# Allegro board GPS_INTERFACE_BOARDv4.brd
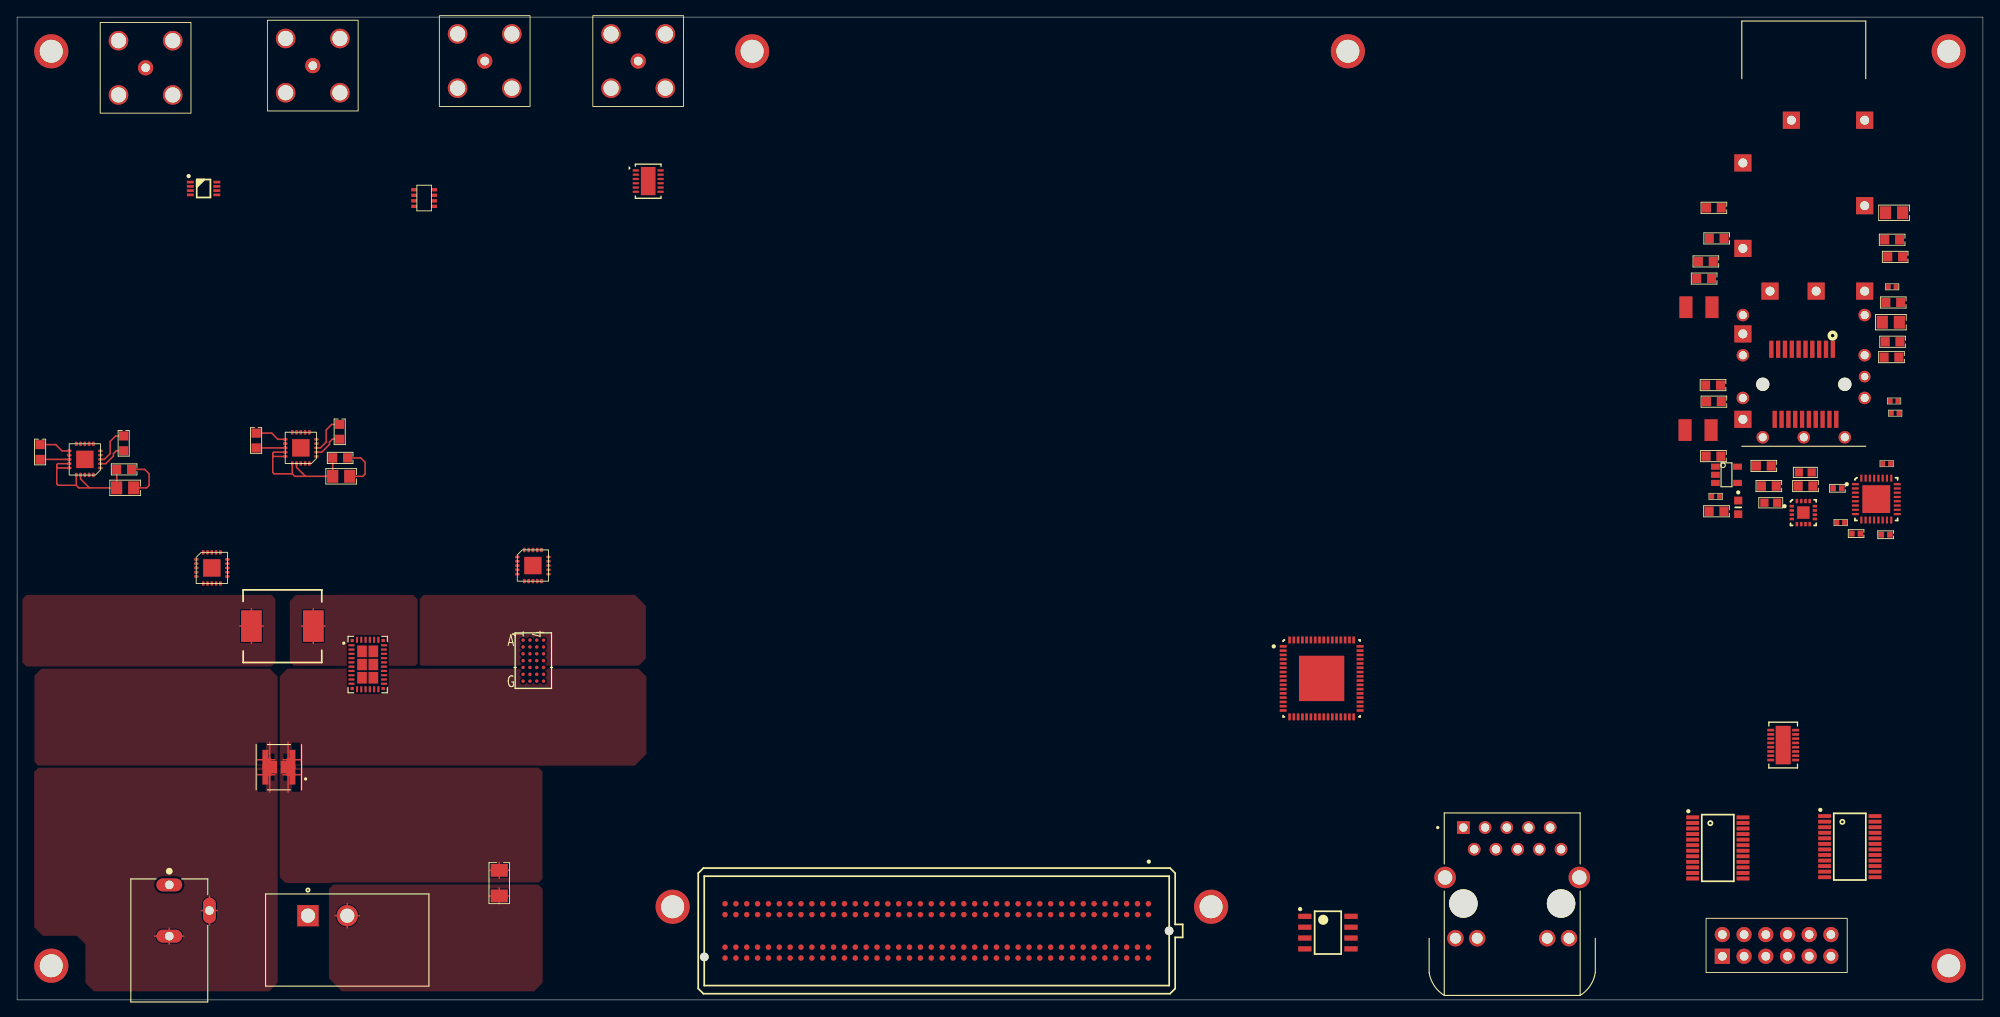
[diagram p0: board, top side]
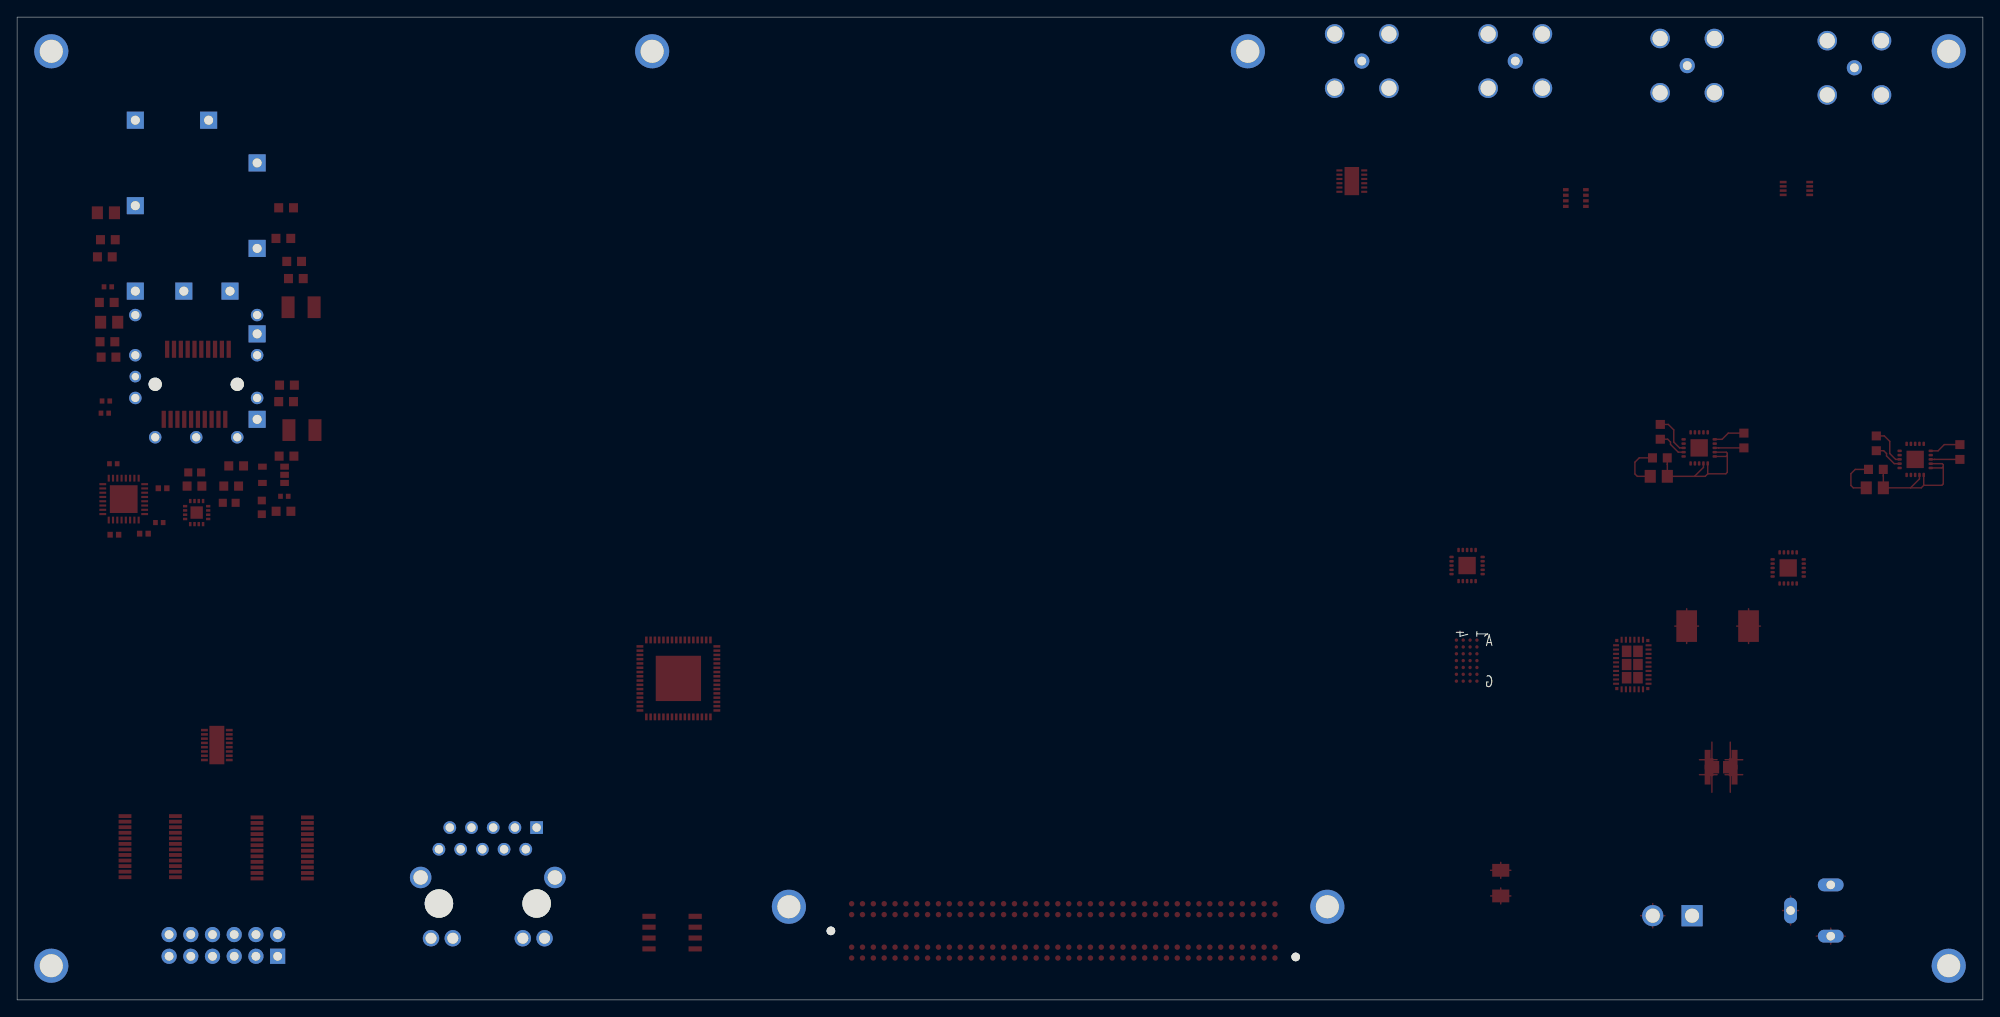
[diagram p1: board, bottom side, seen from below]

Outline 230 x 115 mm; copper layers: TOP, L2, L3, L4, L5, BOTTOM. Coordinates in mm from the lower left corner of the outline.
Outline path: 0,115 230,115 230,0 0,0 0,115

## Design rules (mm)
constraint set DEFAULT: min track width 0.17, pair gap 0.3
net group GPS_GROUP[0..4]: nets GPS_GROUP.GPS_CLK_N GPS_GROUP.GPS_CLK_P
net group CLK_TO_SFP[0..11]: nets CLK_TO_SFP.CLK_TO_SFP_N0 CLK_TO_SFP.CLK_TO_SFP_N1 CLK_TO_SFP.CLK_TO_SFP_N2 CLK_TO_SFP.CLK_TO_SFP_N3 CLK_TO_SFP.CLK_TO_SFP_N4 CLK_TO_SFP.CLK_TO_SFP_N5 CLK_TO_SFP.CLK_TO_SFP_P0 CLK_TO_SFP.CLK_TO_SFP_P1 CLK_TO_SFP.CLK_TO_SFP_P2 CLK_TO_SFP.CLK_TO_SFP_P3 CLK_TO_SFP.CLK_TO_SFP_P4 CLK_TO_SFP.CLK_TO_SFP_P5
net group FMC[0..72]: nets FMC.CLK_FILTER_A FMC.CLK_FILTER_B FMC.CLK_GEN_INTR* FMC.CLK_GEN_LOL FMC.CLK_GEN_LOL_N FMC.CLK_GEN_RST* FMC.CLK_TO_FPGA_N FMC.CLK_TO_FPGA_P FMC.DATA_TO_FF_N0 FMC.DATA_TO_FF_N1 FMC.DATA_TO_FF_N2 FMC.DATA_TO_FF_N3 FMC.DATA_TO_FF_N4 FMC.DATA_TO_FF_N5 FMC.DATA_TO_FF_P0 FMC.DATA_TO_FF_P1 FMC.DATA_TO_FF_P2 FMC.DATA_TO_FF_P3 FMC.DATA_TO_FF_P4 FMC.DATA_TO_FF_P5 FMC.GPS_CLK_EN* FMC.GPS_IRIGB FMC.GPS_PPS_N FMC.GPS_PPS_P FMC.GPS_SYNC_OUT_N FMC.GPS_SYNC_OUT_P FMC.I2C_BUS_INT0* FMC.I2C_BUS_INT1* FMC.I2C_BUS_RST* FMC.OSC_EN FMC.PWR_GOOD FMC.RECOV_CLK_N0 FMC.RECOV_CLK_N1 FMC.RECOV_CLK_N2 FMC.RECOV_CLK_N3 FMC.RECOV_CLK_N4 FMC.RECOV_CLK_N5 FMC.RECOV_CLK_P0 FMC.RECOV_CLK_P1 FMC.RECOV_CLK_P2 FMC.RECOV_CLK_P3 FMC.RECOV_CLK_P4 FMC.RECOV_CLK_P5 FMC.RECOV_DATA_N0 FMC.RECOV_DATA_N1 FMC.RECOV_DATA_N2 FMC.RECOV_DATA_N3 FMC.RECOV_DATA_N4 FMC.RECOV_DATA_N5 FMC.RECOV_DATA_P0 FMC.RECOV_DATA_P1 FMC.RECOV_DATA_P2 FMC.RECOV_DATA_P3 FMC.RECOV_DATA_P4 FMC.RECOV_DATA_P5 FMC.SCL FMC.SDA FMC.SFP_TX_DISABLE0 FMC.SFP_TX_DISABLE1 FMC.SFP_TX_DISABLE2 FMC.SFP_TX_DISABLE3 FMC.SFP_TX_DISABLE4 FMC.SFP_TX_DISABLE5 FMC.SPARE_BNC_0 FMC.SPARE_BNC_1 FMC.SPARE_LEMO_0 FMC.SPARE_LEMO_1 FMC.SPARE_RJ45_RX_0 FMC.SPARE_RJ45_RX_1 FMC.SPARE_RJ45_TX_0 FMC.SPARE_RJ45_TX_1 FMC.SPARE_RJ45_TX_EN_0 FMC.SPARE_RJ45_TX_EN_1
net group VM1: nets GND_SIGNAL

## Placement (name value [footprint] x y rotation side)
C60  0.1UF  [CAP0603]  12.52 62.08 0 top
C61  47UF  [CAP0805]  12.65 59.92 0 top
C64  0.1UF  [CAP0603]  12.47 65.13 90 top
C65  0.01UF  [CAP0603]  2.69 64.11 90 top
C70  47UF  [CAP0805]  37.92 61.26 0 top
C71  0.1UF  [CAP0603]  37.8 63.42 0 top
C75  0.1UF  [CAP0603]  37.74 66.47 90 top
C76  0.01UF  [CAP0603]  27.97 65.46 90 top
C111  0.1UF  [CAP0603]  219.3 75.21 0 top
C112  0.1UF  [CAP0603]  219.74 86.94 0 top
C113  22UF  [CAP0805]  219.61 92.1 0 top
C114  0.1UF  [CAP0603]  219.38 88.95 0 top
C115  0.1UF  [CAP0603]  197.59 86.41 0 top
C116  22UF  [CAP0805]  219.23 79.3 0 top
C117  0.1UF  [CAP0603]  209.25 60.12 0 top
C118  1000PF  [CAP0603]  204.95 60.12 0 top
C121  0.1UF  [CAP0603]  198.42 71.93 0 top
C122  0.1UF  [CAP0603]  197.38 84.4 0 top
C123  0.1UF  [CAP0603]  198.48 63.63 0 top
C124  0.1UF  [CAP0603]  219.51 81.61 0 top
C125  0.1UF  [CAP0603]  198.53 70 0 top
C126  1000PF  [CAP0603]  198.85 89.1 0 top
C127  1000PF  [CAP0603]  204.37 62.48 0 top
C128  1000PF  [CAP0603]  198.83 57.18 0 top
C129  1000PF  [CAP0603]  198.53 92.68 0 top
C130  1000PF  [CAP0603]  219.43 77.01 0 top
C131  0.47UF  [CAP0402]  218.62 54.43 0 top
C132  0.1UF  [CAP0402]  215.16 54.56 0 top
C133  0.1UF  [CAP0402]  212.98 59.87 0 top
D13  RED  [LEDC1608X80N]  201.37 57.63 270 top
F1  4A  [CAP1206]  56.41 13.67 90 top
FL1  120 Ohm@100MHz  [FIL_DLW5BTM501SQ2L]  30.63 27.23 270 top
IC1  SN74AVC2T45DCTR  [SOP50P310X90-8N]  21.82 94.95 0 top
IC2  SI5395A-A-GM  [QFN50P900X900X90-65N-S530]  152.63 37.62 0 top
IC3  24AA025E48T-I/OT  [SOIC127P600X175-8N]  153.37 7.87 0 top
IC6  PCA9539PW,118  [SOP65P640X110-24N]  214.43 17.93 0 top
IC7  PCA9539PW,118  [SOP65P640X110-24N]  198.98 17.78 0 top
J1  BNC/R  [BNC_RA_03161221]  72.67 109.86 0 top
J4  BNC/R  [BNC_RA_03161221]  54.71 109.86 0 top
J5  BNC/R  [BNC_RA_03161221]  34.59 109.32 0 top
J6  BNC/R  [BNC_RA_03161221]  15.04 109.07 0 top
J7  PJ-102AH  [CUI_PJ-102AH]  17.81 6.96 270 top
J8  ASP-134606-01  [SAMTEC_ASP-134606-01]  107.59 8.08 0 top
J17  6-2301994-2  [TE_6-2301994-2]  174.93 11.2 0 top
J18  1367073-1  [TE_2227023-1]  209.04 72.03 270 top
L6  3.3 uH  [WE-LHMI_8040]  31.04 43.74 180 top
L7  4.7 uH  [CAP1210]  196.77 81.05 0 top
L8  4.7 uH  [CAP1210]  196.67 66.67 0 top
NOREF  -  [unnamed]  226 4 0 top
NOREF#2  -  [unnamed]  4 4 0 top
NOREF#3  -  [unnamed]  226 111 0 top
NOREF#4  -  [unnamed]  155.7 111 0 top
NOREF#5  -  [unnamed]  4 111 0 top
NOREF#6  -  [unnamed]  86 111 0 top
NOREF#7  -  [unnamed]  76.7 10.9 0 top
NOREF#8  -  [unnamed]  139.7 10.9 0 top
P1  RECP6X2  [RECPT6X2_100]  199.52 5.11 90 top
R92  4.7k  [RES0402]  219.38 83.44 0 top
R93  4.7k  [RES0402]  198.73 58.93 0 top
R95  4.7k  [RES0402]  219.61 70.08 0 top
R96  4.99K  [RES0603]  209.22 61.72 0 top
R97  4.7k  [RES0402]  219.74 68.66 0 top
R98  4.99K  [RES0603]  205.18 58.17 0 top
R102  0  [RES0402]  213.36 55.85 0 top
R103  0  [RES0402]  218.74 62.74 0 top
S1  L101011MS02Q  [SW_L101011MS02Q]  38.63 7.01 0 top
U1  LTC6957IDD-2#PBF  [DFN_12]  73.84 95.81 0 top
U2  MAX9371EKA+  [SOT-23-8]  47.62 93.83 0 top
U5  LTM8063EY#PBF  [BGA28]  60.4 39.7 0 top
U6  LT8645SJV-2  [CONV_T8645SIV]  41.02 39.24 0 top
U7  TPS7A8500RGRT  [QFN20_3P65MMSQ]  60.35 50.83 0 top
U9  TPS7A8500RGRT  [QFN20_3P65MMSQ]  7.92 63.25 180 top
U11  TPS7A8500RGRT  [QFN20_3P65MMSQ]  33.2 64.59 180 top
U12  TPS7A8500RGRT  [QFN20_3P65MMSQ]  22.78 50.55 0 top
U16  NB7V52MMNG  [PQFN50P300X300X100-17N-S145]  208.99 57.02 0 top
U17  ADN2814ACPZ  [QFN50P500X500X100-33N-S325]  217.53 58.6 0 top
U18  SN74LVC1G32  [SOT23-5]  200 61.44 0 top
U40  LTC4317CDHC#PBF  [DFN-16_DHC]  206.63 29.82 0 top

## Library data of the parts
C60 C61 C64 C65 C70 C71 C75 C76 = CAP_NP: Tolerance: TOL?; User Part Number: PN?
C111-C118 C121-C133 = CAP_NP: Tolerance: TOL?; User Part Number: PN?; room: SFP1
D13 = LED: room: SFP1
F1 = FUSE: Tolerance: TOL?; User Part Number: PN?
FL1 = 490-11112-1-ND
IC1 = 74AVC2T45_DCT_0
IC2 = SI5395_QFN_1
IC3 = 24AA025E48_SOIC_0
IC6 IC7 = PCA9539_TSSOP_0
J1 J4-J6 = BNCR_3
J7 = PJ-102AH
J8 = CON160P_10
J17 = 6-2301994-2
J18 = CON20P_SFP-1367073-1_1: room: SFP1
L6 = IND
L7 L8 = IND: room: SFP1
P1 = RECPT 6X2 100MIL
R92 R93 R95-R98 R102 R103 = R: Tolerance: TOL?; User Part Number: PN?; room: SFP1
S1 = L101011MS02Q
U1 = LTC6957-2_3
U2 = MAX9371_2
U5 = LTM8063_0: User Part Number: PN; Tolerance: TOL
U6 = LT8645
U7 U9 U11 U12 = TPS7A8500RGRT
U16 = NB7V52M_2: room: SFP1
U17 = ADN2814ACPZ_1: room: SFP1
U18 = SN74LVC1G32_4: room: SFP1
U40 = LTC4317CDHC_0: User Part Number: PN; Tolerance: TOL

## Footprints (pads in the part's own frame, mm; a bottom-side part is the same pattern mirrored in y, then rotated)
BGA28
  round 0.4 smd: A1(-1.2,2.4) A2(-0.4,2.4) A3(0.4,2.4) A4(1.2,2.4) B1(-1.2,1.6) B2(-0.4,1.6) B3(0.4,1.6) B4(1.2,1.6) C1(-1.2,0.8) C2(-0.4,0.8) C3(0.4,0.8) C4(1.2,0.8) D1(-1.2,0) D2(-0.4,0) D3(0.4,0) D4(1.2,0) E1(-1.2,-0.8) E2(-0.4,-0.8) E3(0.4,-0.8) E4(1.2,-0.8) F1(-1.2,-1.6) F2(-0.4,-1.6) F3(0.4,-1.6) F4(1.2,-1.6) G1(-1.2,-2.4) G2(-0.4,-2.4) G3(0.4,-2.4) G4(1.2,-2.4)
BNC_RA_03161221
  round 1.778 hole 1.016: 1(0,0)
  round 2.286 hole 1.778: 2(3.175,3.175) 3(3.175,-3.175) 4(-3.175,-3.175) 5(-3.175,3.175)
CAP0402
  rect 0.635x0.686 smd: 1(-0.499,0) 2(0.499,0)
CAP0603
  rect 1.05x1.08 smd: 1(-0.865,0) 2(0.865,0)
CAP0805
  rect 1.3x1.5 smd: 1(-1,0) 2(1,0)
CAP1206
  rect 1.5x2 smd: 1(-1.5,0) 2(1.5,0)
CAP1210
  rect 1.524x2.54 smd: 1(-1.524,0) 2(1.524,0)
CONV_T8645SIV
  rect 0.7x0.25 smd: 1(-1.9,2.25) 2(-1.9,1.75) 3(-1.9,1.25) 4(-1.9,0.75) 5(-1.9,0.25) 6(-1.9,-0.25) 7(-1.9,-0.75) 8(-1.9,-1.25) 9(-1.9,-1.75) 10(-1.9,-2.25) 17(1.9,-2.25) 18(1.9,-1.75) 19(1.9,-1.25) 20(1.9,-0.75) 21(1.9,-0.25) 22(1.9,0.25) 23(1.9,0.75) 24(1.9,1.25) 25(1.9,1.75) 26(1.9,2.25)
  rect 0.25x0.7 smd: 11(-1.25,-2.9) 12(-0.75,-2.9) 13(-0.25,-2.9) 14(0.25,-2.9) 15(0.75,-2.9) 16(1.25,-2.9) 27(1.25,2.9) 28(0.75,2.9) 29(0.25,2.9) 30(-0.25,2.9) 31(-0.75,2.9) 32(-1.25,2.9)
  rect 1.125x1.355 smd: 33(-0.662,1.543) 34(0.662,1.543) 37(-0.662,-1.543) 38(0.662,-1.543)
  rect 1.125x1.33 smd: 35(-0.662,0) 36(0.662,0)
  rect 0.375x0.375 smd: 39(-1.813,2.813) 40(-1.813,-2.813) 41(1.813,-2.813) 42(1.813,2.813)
CUI_PJ-102AH
  oval 1.508x3.016 hole 1: 1(-6.5,0) 2(-0.5,0)
  oval 3.016x1.508 hole 1: 3(-3.5,4.7)
DFN-16_DHC
  rect 0.805x0.3 smd: 1(-1.452,1.75) 2(-1.452,1.25) 3(-1.452,0.75) 4(-1.452,0.25) 5(-1.452,-0.25) 6(-1.452,-0.75) 7(-1.452,-1.25) 8(-1.452,-1.75) 9(1.452,-1.75) 10(1.452,-1.25) 11(1.452,-0.75) 12(1.452,-0.25) 13(1.452,0.25) 14(1.452,0.75) 15(1.452,1.25) 16(1.452,1.75)
  rect 1.75x4.5 smd: 17(0,0)
DFN_12
  rect 0.711x0.254 smd: 1(-1.45,1.25) 2(-1.45,0.75) 3(-1.45,0.25) 4(-1.45,-0.25) 5(-1.45,-0.75) 6(-1.45,-1.25) 7(1.45,-1.25) 8(1.45,-0.75) 9(1.45,-0.25) 10(1.45,0.25) 11(1.45,0.75) 12(1.45,1.25)
  rect 1.702x3.302 smd: 13(0,0)
FIL_DLW5BTM501SQ2L
  custom 2.3x1.7 smd: 1(0.875,1.075) 2(-0.875,1.075) 3(-0.875,-1.075) 4(0.875,-1.075)
LEDC1608X80N
  rect 0.9x0.95 smd: 1(-0.8,0) 2(0.8,0)
PQFN50P300X300X100-17N-S145
  rect 0.5x0.3 smd: 1(-1.35,0.75) 2(-1.35,0.25) 3(-1.35,-0.25) 4(-1.35,-0.75) 9(1.35,-0.75) 10(1.35,-0.25) 11(1.35,0.25) 12(1.35,0.75)
  rect 0.3x0.5 smd: 5(-0.75,-1.35) 6(-0.25,-1.35) 7(0.25,-1.35) 8(0.75,-1.35) 13(0.75,1.35) 14(0.25,1.35) 15(-0.25,1.35) 16(-0.75,1.35)
  rect 1.45x1.45 smd: 17(0,0)
QFN20_3P65MMSQ
  rrect 0.51x0.305 smd: 1(-1.82,1) 2(-1.82,0.5) 3(-1.82,0) 4(-1.82,-0.5) 5(-1.82,-1) 11(1.82,-1) 12(1.82,-0.5) 13(1.82,0) 14(1.82,0.5) 15(1.82,1)
  rrect 0.305x0.51 smd: 6(-1,-1.82) 7(-0.5,-1.82) 8(0,-1.82) 9(0.5,-1.82) 10(1,-1.82) 16(1,1.82) 17(0.5,1.82) 18(0,1.82) 19(-0.5,1.82) 20(-1,1.82)
  rect 2.032x2.032 smd: 21(0,0)
QFN50P500X500X100-33N-S325
  rect 0.8x0.25 smd: 1(-2.45,1.75) 2(-2.45,1.25) 3(-2.45,0.75) 4(-2.45,0.25) 5(-2.45,-0.25) 6(-2.45,-0.75) 7(-2.45,-1.25) 8(-2.45,-1.75) 17(2.45,-1.75) 18(2.45,-1.25) 19(2.45,-0.75) 20(2.45,-0.25) 21(2.45,0.25) 22(2.45,0.75) 23(2.45,1.25) 24(2.45,1.75)
  rect 0.25x0.8 smd: 9(-1.75,-2.45) 10(-1.25,-2.45) 11(-0.75,-2.45) 12(-0.25,-2.45) 13(0.25,-2.45) 14(0.75,-2.45) 15(1.25,-2.45) 16(1.75,-2.45) 25(1.75,2.45) 26(1.25,2.45) 27(0.75,2.45) 28(0.25,2.45) 29(-0.25,2.45) 30(-0.75,2.45) 31(-1.25,2.45) 32(-1.75,2.45)
  rect 3.25x3.25 smd: 33(0,0)
QFN50P900X900X90-65N-S530
  rect 0.8x0.3 smd: 1(-4.5,3.75) 2(-4.5,3.25) 3(-4.5,2.75) 4(-4.5,2.25) 5(-4.5,1.75) 6(-4.5,1.25) 7(-4.5,0.75) 8(-4.5,0.25) 9(-4.5,-0.25) 10(-4.5,-0.75) 11(-4.5,-1.25) 12(-4.5,-1.75) 13(-4.5,-2.25) 14(-4.5,-2.75) 15(-4.5,-3.25) 16(-4.5,-3.75) 33(4.5,-3.75) 34(4.5,-3.25) 35(4.5,-2.75) 36(4.5,-2.25) 37(4.5,-1.75) 38(4.5,-1.25) 39(4.5,-0.75) 40(4.5,-0.25) 41(4.5,0.25) 42(4.5,0.75) 43(4.5,1.25) 44(4.5,1.75) 45(4.5,2.25) 46(4.5,2.75) 47(4.5,3.25) 48(4.5,3.75)
  rect 0.3x0.8 smd: 17(-3.75,-4.5) 18(-3.25,-4.5) 19(-2.75,-4.5) 20(-2.25,-4.5) 21(-1.75,-4.5) 22(-1.25,-4.5) 23(-0.75,-4.5) 24(-0.25,-4.5) 25(0.25,-4.5) 26(0.75,-4.5) 27(1.25,-4.5) 28(1.75,-4.5) 29(2.25,-4.5) 30(2.75,-4.5) 31(3.25,-4.5) 32(3.75,-4.5) 49(3.75,4.5) 50(3.25,4.5) 51(2.75,4.5) 52(2.25,4.5) 53(1.75,4.5) 54(1.25,4.5) 55(0.75,4.5) 56(0.25,4.5) 57(-0.25,4.5) 58(-0.75,4.5) 59(-1.25,4.5) 60(-1.75,4.5) 61(-2.25,4.5) 62(-2.75,4.5) 63(-3.25,4.5) 64(-3.75,4.5)
  rect 5.3x5.3 smd: 65(0,0)
RECPT6X2_100
  rect 1.778x1.778 hole 1.016: 1(0,0)
  round 1.778 hole 1.016: 2(2.54,0) 3(0,-2.54) 4(2.54,-2.54) 5(0,-5.08) 6(2.54,-5.08) 7(0,-7.62) 8(2.54,-7.62) 9(0,-10.16) 10(2.54,-10.16) 11(0,-12.7) 12(2.54,-12.7)
RES0402
  rect 0.55x0.6 smd: 1(-0.45,0) 2(0.45,0)
RES0603
  rect 0.95x0.95 smd: 1(-0.75,0) 2(0.75,0)
SAMTEC_ASP-134606-01
  round 1.001 hole 1.3 unplated: (-27.19,-3.05) (27.19,0)
  round 0.64 smd: C1(24.765,3.175) C2(23.495,3.175) C3(22.225,3.175) C4(20.955,3.175) C5(19.685,3.175) C6(18.415,3.175) C7(17.145,3.175) C8(15.875,3.175) C9(14.605,3.175) C10(13.335,3.175) C11(12.065,3.175) C12(10.795,3.175) C13(9.525,3.175) C14(8.255,3.175) C15(6.985,3.175) C16(5.715,3.175) C17(4.445,3.175) C18(3.175,3.175) C19(1.905,3.175) C20(0.635,3.175) C21(-0.635,3.175) C22(-1.905,3.175) C23(-3.175,3.175) C24(-4.445,3.175) C25(-5.715,3.175) C26(-6.985,3.175) C27(-8.255,3.175) C28(-9.525,3.175) C29(-10.795,3.175) C30(-12.065,3.175) C31(-13.335,3.175) C32(-14.605,3.175) C33(-15.875,3.175) C34(-17.145,3.175) C35(-18.415,3.175) C36(-19.685,3.175) C37(-20.955,3.175) C38(-22.225,3.175) C39(-23.495,3.175) C40(-24.765,3.175) D1(24.765,1.905) D2(23.495,1.905) D3(22.225,1.905) D4(20.955,1.905) D5(19.685,1.905) D6(18.415,1.905) D7(17.145,1.905) D8(15.875,1.905) D9(14.605,1.905) D10(13.335,1.905) D11(12.065,1.905) D12(10.795,1.905) D13(9.525,1.905) D14(8.255,1.905) D15(6.985,1.905) D16(5.715,1.905) D17(4.445,1.905) D18(3.175,1.905) D19(1.905,1.905) D20(0.635,1.905) D21(-0.635,1.905) D22(-1.905,1.905) D23(-3.175,1.905) D24(-4.445,1.905) D25(-5.715,1.905) D26(-6.985,1.905) D27(-8.255,1.905) D28(-9.525,1.905) D29(-10.795,1.905) D30(-12.065,1.905) D31(-13.335,1.905) D32(-14.605,1.905) D33(-15.875,1.905) D34(-17.145,1.905) D35(-18.415,1.905) D36(-19.685,1.905) D37(-20.955,1.905) D38(-22.225,1.905) D39(-23.495,1.905) D40(-24.765,1.905) G1(24.765,-1.905) G2(23.495,-1.905) G3(22.225,-1.905) G4(20.955,-1.905) G5(19.685,-1.905) G6(18.415,-1.905) G7(17.145,-1.905) G8(15.875,-1.905) G9(14.605,-1.905) G10(13.335,-1.905) G11(12.065,-1.905) G12(10.795,-1.905) G13(9.525,-1.905) G14(8.255,-1.905) G15(6.985,-1.905) G16(5.715,-1.905) G17(4.445,-1.905) G18(3.175,-1.905) G19(1.905,-1.905) G20(0.635,-1.905) G21(-0.635,-1.905) G22(-1.905,-1.905) G23(-3.175,-1.905) G24(-4.445,-1.905) G25(-5.715,-1.905) G26(-6.985,-1.905) G27(-8.255,-1.905) G28(-9.525,-1.905) G29(-10.795,-1.905) G30(-12.065,-1.905) G31(-13.335,-1.905) G32(-14.605,-1.905) G33(-15.875,-1.905) G34(-17.145,-1.905) G35(-18.415,-1.905) G36(-19.685,-1.905) G37(-20.955,-1.905) G38(-22.225,-1.905) G39(-23.495,-1.905) G40(-24.765,-1.905) H1(24.765,-3.175) H2(23.495,-3.175) H3(22.225,-3.175) H4(20.955,-3.175) H5(19.685,-3.175) H6(18.415,-3.175) H7(17.145,-3.175) H8(15.875,-3.175) H9(14.605,-3.175) H10(13.335,-3.175) H11(12.065,-3.175) H12(10.795,-3.175) H13(9.525,-3.175) H14(8.255,-3.175) H15(6.985,-3.175) H16(5.715,-3.175) H17(4.445,-3.175) H18(3.175,-3.175) H19(1.905,-3.175) H20(0.635,-3.175) H21(-0.635,-3.175) H22(-1.905,-3.175) H23(-3.175,-3.175) H24(-4.445,-3.175) H25(-5.715,-3.175) H26(-6.985,-3.175) H27(-8.255,-3.175) H28(-9.525,-3.175) H29(-10.795,-3.175) H30(-12.065,-3.175) H31(-13.335,-3.175) H32(-14.605,-3.175) H33(-15.875,-3.175) H34(-17.145,-3.175) H35(-18.415,-3.175) H36(-19.685,-3.175) H37(-20.955,-3.175) H38(-22.225,-3.175) H39(-23.495,-3.175) H40(-24.765,-3.175)
SOIC127P600X175-8N
  rect 1.55x0.6 smd: 1(-2.7,1.905) 2(-2.7,0.635) 3(-2.7,-0.635) 4(-2.7,-1.905) 5(2.7,-1.905) 6(2.7,-0.635) 7(2.7,0.635) 8(2.7,1.905)
SOP50P310X90-8N
  rect 0.8x0.3 smd: 1(-1.55,0.75) 2(-1.55,0.25) 3(-1.55,-0.25) 4(-1.55,-0.75) 5(1.55,-0.75) 6(1.55,-0.25) 7(1.55,0.25) 8(1.55,0.75)
SOP65P640X110-24N
  rect 1.5x0.45 smd: 1(-2.95,3.575) 2(-2.95,2.925) 3(-2.95,2.275) 4(-2.95,1.625) 5(-2.95,0.975) 6(-2.95,0.325) 7(-2.95,-0.325) 8(-2.95,-0.975) 9(-2.95,-1.625) 10(-2.95,-2.275) 11(-2.95,-2.925) 12(-2.95,-3.575) 13(2.95,-3.575) 14(2.95,-2.925) 15(2.95,-2.275) 16(2.95,-1.625) 17(2.95,-0.975) 18(2.95,-0.325) 19(2.95,0.325) 20(2.95,0.975) 21(2.95,1.625) 22(2.95,2.275) 23(2.95,2.925) 24(2.95,3.575)
SOT23-5
  rect 1.016x0.711 smd: 1(-1.295,0.953) 2(-1.295,0) 3(-1.295,-0.953) 4(1.295,-0.953) 5(1.295,0.953)
SOT-23-8
  rect 0.66x0.381 smd: 1(-1.175,0.975) 2(-1.175,0.325) 3(-1.175,-0.325) 4(-1.175,-0.975) 5(1.175,-0.975) 6(1.175,-0.325) 7(1.175,0.325) 8(1.175,0.975)
SW_L101011MS02Q
  rect 2.48x2.48 hole 1.65: 1(-4.6,2.85)
  round 2.48 hole 1.65: 2(0,2.85)
TE_6-2301994-2
  round 3.33 hole 3.33 unplated: (-5.715,0.075) (5.715,0.075)
  rect 1.488x1.488 hole 0.98: P1(-5.715,8.965)
  round 1.488 hole 0.98: P2(-4.445,6.425) P3(-3.175,8.965) P4(-1.905,6.425) P5(-0.635,8.965) P6(0.635,6.425) P7(1.905,8.965) P8(3.175,6.425) P9(4.445,8.965) P10(5.715,6.425)
  round 1.92 hole 1.28: P11(-6.645,-3.985) P12(-4.095,-3.985) P13(4.095,-3.985) P14(6.645,-3.985)
  round 2.52 hole 1.68: S1(-7.855,3.125) S2(7.855,3.125)
TE_2227023-1
  round 1.55 hole 1.55 unplated: (0,4.8) (0,-4.8)
  rect 2x0.5 smd: 1(-4.1,3.4) 2(-4.1,2.6) 3(-4.1,1.8) 4(-4.1,1) 5(-4.1,0.2) 6(-4.1,-0.6) 7(-4.1,-1.4) 8(-4.1,-2.2) 9(-4.1,-3) 10(-4.1,-3.8) 11(4.1,-3.4) 12(4.1,-2.6) 13(4.1,-1.8) 14(4.1,-1) 15(4.1,-0.2) 16(4.1,0.6) 17(4.1,1.4) 18(4.1,2.2) 19(4.1,3) 20(4.1,3.8)
  round 1.358 hole 0.85: S1(-0.9,7.125)
  round 1.458 hole 0.95: S2(1.6,7.125) S3(-3.4,7.125) S4(-8.1,7.125) S5(6.2,4.8) S6(6.2,0) S7(6.2,-4.8) S8(1.6,-7.125) S9(-3.4,-7.125) S10(-8.1,-7.125)
  rect 2x2 hole 1.05: S11(-10.9,7.125) S12(-20.9,7.125) S13(-30.9,7.125) S14(-10.9,1.45) S15(-30.9,-1.45) S16(-10.9,-3.95) S17(-25.9,-7.125) S18(-15.9,-7.125) S19(-5.9,-7.125) S20(4.1,-7.125)
unnamed
  round 3.988 hole 2.692: 1(0,0)
WE-LHMI_8040
  rect 2.42x3.7 smd: 1(-3.62,0) 2(3.62,0)

## Nets
12V_CONN: J7.1 S1.1
12V_FUSE: F1.2 FL1.1
12V_SW: F1.1 S1.2
GND_IN: FL1.4 J7.2 J7.3
GND_POWER: C60.2 C61.2 C65.2 C70.2 C71.2 C76.2 FL1.3 IC1.3 IC1.4 IC2.65 J1.2 J1.3 J1.4 J1.5 J4.2 J4.3 J4.4 J4.5 J5.2 J5.3 J5.4 J5.5 J6.2 J6.3 J6.4 J6.5 J8.C1 J8.C4 J8.C5 J8.C9 J8.C12 J8.C13 J8.C16 J8.C17 J8.C20 J8.C21 J8.C24 J8.C25 J8.C28 J8.C29 J8.C32 J8.C33 J8.C34 J8.C36 J8.C38 J8.C40 J8.D2 J8.D3 J8.D6 J8.D7 J8.D10 J8.D13 J8.D16 J8.D19 J8.D22 J8.D25 J8.D28 J8.D34 J8.D37 J8.D39 J8.G1 J8.G4 J8.G5 J8.G8 J8.G11 J8.G14 J8.G17 J8.G20 J8.G23 J8.G26 J8.G29 J8.G32 J8.G35 J8.G38 J8.G40 J8.H3 J8.H6 J8.H9 J8.H12 J8.H15 J8.H18 J8.H21 J8.H24 J8.H27 J8.H30 J8.H33 J8.H36 J8.H39 J17.P10 J17.P11 J17.P12 J17.P13 J17.P14 J17.S1 J17.S2(SHIELD_1) P1.2 P1.4 P1.6 P1.8 P1.10 P1.12 U1.5 U1.13 U2.2 U5.A1 U5.A4 U5.B2 U5.C2 U5.C3 U5.D1 U5.D2 U5.D3 U5.D4 U5.E1 U5.E2 U5.E3 U5.E4 U6.3 U6.7 U6.8 U6.9 U6.10 U6.17 U6.18 U6.19 U6.20 U6.24 U6.30 U6.33 U6.34 U6.35 U6.36 U6.37 U6.38 U6.39 U6.40 U6.41 U6.42 U7.8 U7.18 U7.21 U9.6 U9.8 U9.10 U9.11 U9.18 U9.21 U11.6 U11.8 U11.10 U11.11 U11.18 U11.21 U12.7 U12.8 U12.10 U12.18 U12.21
GND_SIGNAL: C111.2 C112.2 C113.1 C114.1 C115.1 C116.1 C117.2 C118.2 C121.1 C122.1 C123.1 C124.1 C125.1 C126.2 C127.2 C128.2 C129.2 C130.2 C132.1 C133.2 IC3.4(VSS) IC6.12 IC7.12 J18.1 J18.9 J18.10 J18.11 J18.14 J18.17 J18.20(VEET2) J18.S1 J18.S2 J18.S3 J18.S4 J18.S5 J18.S6 J18.S7 J18.S8 J18.S9 J18.S10 J18.S11 J18.S12 J18.S13 J18.S14 J18.S15 J18.S16 J18.S17 J18.S18 J18.S19 J18.S20 R96.1 R102.1 R103.2 U16.9 U16.17 U17.6 U17.7 U17.8 U17.11 U17.13 U17.17 U17.23 U17.30 U17.33 U18.3 U40.1 U40.3 U40.5 U40.17
VCC3V3: C111.1 C112.1 C121.2 C122.2 C123.2 C124.2 C125.2 C126.1 C127.1 C128.1 C129.1 C130.1 IC1.8(VCCB) IC3.8 IC6.24(VDD) IC7.24(VDD) L7.1 L8.1 P1.9 R92.1 R93.1 R95.1 R97.1 U17.1 U17.2 U17.10 U17.12 U17.18 U17.24 U17.31 U17.32 U18.5 U40.7
VCC3V3_LFILT: U1.2(VCC)
VCC5V: IC1.1 IC1.5 P1.11
VCC5V_LFILT: U2.1(VCC)
VCC_1V8: C117.1 C118.1 R98.1 U16.12
VCCR_SFP INTERFACE_SFP1: C113.2 C114.2 J18.15 L7.2
VCCT_SFP INTERFACE_SFP1: C115.2 C116.2 J18.16 L8.2
VDD_FILT: IC2.32 IC2.46 IC2.60
VDDA_FILT: IC2.13
VDDO8: IC2.52
VDDO9: IC2.57
VDDO_FILT: IC2.22 IC2.26 IC2.29 IC2.33 IC2.36 IC2.40 IC2.43 IC2.49
A0_1: IC6.21
A0_2: IC7.21
A0_BID: IC3.1
A1_1: IC6.2
A1_2: IC7.2
A1_BID: IC3.2
A2_BID: IC3.3
CLK_FDBACK_N: IC2.62
CLK_FDBACK_P: IC2.61
CLK_TO_SFP.CLK_TO_SFP_N0: IC2.23 U16.7
CLK_TO_SFP.CLK_TO_SFP_N1: IC2.27
CLK_TO_SFP.CLK_TO_SFP_N2: IC2.30
CLK_TO_SFP.CLK_TO_SFP_N3: IC2.34
CLK_TO_SFP.CLK_TO_SFP_N4: IC2.37
CLK_TO_SFP.CLK_TO_SFP_N5: IC2.41
CLK_TO_SFP.CLK_TO_SFP_P0: IC2.24 U16.6
CLK_TO_SFP.CLK_TO_SFP_P1: IC2.28
CLK_TO_SFP.CLK_TO_SFP_P2: IC2.31
CLK_TO_SFP.CLK_TO_SFP_P3: IC2.35
CLK_TO_SFP.CLK_TO_SFP_P4: IC2.38
CLK_TO_SFP.CLK_TO_SFP_P5: IC2.42
CML_SFP_TD_N_SFP INTERFACE_SFP1: U16.10
CML_SFP_TD_P_SFP INTERFACE_SFP1: U16.11
FB_1V8: U12.3
FB_3V3_1: C64.2 U9.3
FB_3V3_2: C75.2 U11.3
FB_3V5: U6.32
FB_5V: U7.3
FB_5V5: U5.A2
FMC.CLK_FILTER_A: J8.C14 U1.1
FMC.CLK_FILTER_B: J8.C15 U1.6
FMC.CLK_GEN_INTR*: IC2.12 J8.C27
FMC.CLK_GEN_LOL: J8.C26
FMC.CLK_GEN_LOL_N: J8.C10
FMC.CLK_GEN_RST*: IC2.6 J8.C19
FMC.CLK_TO_FPGA_N: IC2.44 J8.G3
FMC.CLK_TO_FPGA_P: IC2.45 J8.G2
FMC.DATA_TO_FF_N0: J8.H8 U16.3
FMC.DATA_TO_FF_N1: J8.H11
FMC.DATA_TO_FF_N2: J8.H14
FMC.DATA_TO_FF_N3: J8.H17
FMC.DATA_TO_FF_N4: J8.H20
FMC.DATA_TO_FF_N5: J8.H23
FMC.DATA_TO_FF_P0: J8.H7 U16.2
FMC.DATA_TO_FF_P1: J8.H10
FMC.DATA_TO_FF_P2: J8.H13
FMC.DATA_TO_FF_P3: J8.H16
FMC.DATA_TO_FF_P4: J8.H19
FMC.DATA_TO_FF_P5: J8.H22
FMC.GPS_CLK_EN*: J8.C11 U1.12
FMC.GPS_IRIGB: IC1.7 J8.D11
FMC.GPS_PPS_N: J8.H5
FMC.GPS_PPS_P: J8.H4
FMC.GPS_SYNC_OUT_N: J8.D21
FMC.GPS_SYNC_OUT_P: J8.D20
FMC.I2C_BUS_INT0*: IC6.1 J8.D14
FMC.I2C_BUS_INT1*: IC7.1 J8.D15
FMC.I2C_BUS_RST*: IC6.3 IC7.3 J8.D12
FMC.OSC_EN: J8.C18
FMC.PWR_GOOD: J8.D1
FMC.RECOV_CLK_N0: J8.G10 U17.25
FMC.RECOV_CLK_N1: J8.G13
FMC.RECOV_CLK_N2: J8.G16
FMC.RECOV_CLK_N3: J8.G19
FMC.RECOV_CLK_N4: J8.G22
FMC.RECOV_CLK_N5: J8.G25
FMC.RECOV_CLK_P0: J8.G9 U17.26
FMC.RECOV_CLK_P1: J8.G12
FMC.RECOV_CLK_P2: J8.G15
FMC.RECOV_CLK_P3: J8.G18
FMC.RECOV_CLK_P4: J8.G21
FMC.RECOV_CLK_P5: J8.G24
FMC.RECOV_DATA_N0: J8.H26 U17.28
FMC.RECOV_DATA_N1: J8.H29
FMC.RECOV_DATA_N2: J8.H32
FMC.RECOV_DATA_N3: J8.H35
FMC.RECOV_DATA_N4: J8.H38
FMC.RECOV_DATA_N5: J8.G37
FMC.RECOV_DATA_P0: J8.H25 U17.29
FMC.RECOV_DATA_P1: J8.H28
FMC.RECOV_DATA_P2: J8.H31
FMC.RECOV_DATA_P3: J8.H34
FMC.RECOV_DATA_P4: J8.H37
FMC.RECOV_DATA_P5: J8.G36
FMC.SCL: IC2.16 IC3.6 IC6.22 IC7.22 J8.C30 J18.5 U17.20 U40.15
FMC.SDA: IC2.18 IC3.5 IC6.23 IC7.23 J8.C31 J18.4 U17.21 U40.12
FMC.SFP_TX_DISABLE0: J8.G27 J18.3
FMC.SFP_TX_DISABLE1: J8.G28
FMC.SFP_TX_DISABLE2: J8.G30
FMC.SFP_TX_DISABLE3: J8.G31
FMC.SFP_TX_DISABLE4: J8.G33
FMC.SFP_TX_DISABLE5: J8.G34
FMC.SPARE_BNC_0: J8.D23
FMC.SPARE_BNC_1: J8.D24
FMC.SPARE_LEMO_0: J8.D26
FMC.SPARE_LEMO_1: J8.D27
FMC.SPARE_RJ45_RX_0: J8.C23
FMC.SPARE_RJ45_RX_1: J8.D8
FMC.SPARE_RJ45_TX_0: J8.C22
FMC.SPARE_RJ45_TX_1: J8.D9
FMC.SPARE_RJ45_TX_EN_0: J8.D17
FMC.SPARE_RJ45_TX_EN_1: J8.D18
FPGA_3V3: J8.C39 J8.D32 J8.D36 J8.D38 J8.D40
FPGA_12V: J8.C35 J8.C37
FPGA_IO_3V3: J8.G39(VCC_IO_2) J8.H40
GPS_CLK10_N: IC2.64
GPS_CLK10_P: IC2.63
GPS_CLK_IN: J1.1(SIGNAL)
GPS_GROUP.GPS_CLK_N: U1.10
GPS_GROUP.GPS_CLK_P: U1.11
GPS_IRIGB_IN: IC1.2 J4.1(SIGNAL)
GPS_PPS_IN: J5.1(SIGNAL) U2.3
GPS_SYNC_IN: J6.1(SIGNAL)
I2C_BUS_UNUSED: IC7.13 IC7.14 IC7.15 IC7.16 IC7.17 IC7.18 IC7.19 IC7.20
LOL*: IC2.47
MOD_ABS_SFP INTERFACE_SFP1: J18.6 R95.2
N01450_SFP INTERFACE_SFP1: C131.1 U17.14
N01454_SFP INTERFACE_SFP1: C131.2 U17.15
N04910_SFP INTERFACE_SFP1: U16.1 U16.4
N04977_SFP INTERFACE_SFP1: U16.5 U16.8
N136741_SFP INTERFACE_SFP1: D13.1(CATHODE)
N141568_SFP INTERFACE_SFP1: D13.2 U18.4(Y)
PG_1V8: U12.4
PG_3V3: U9.4 U11.4
PG_3V5: U6.31
PG_5V: U7.4
PG_5V5: U5.B1
R_N_SFP INTERFACE_SFP1: R98.2 U16.15
R_P_SFP INTERFACE_SFP1: R96.2 U16.14
RDY1: U40.10
RDY2: U40.9
RS_SFP INTERFACE_SFP1: J18.7 R97.2
RT_3V5: U6.26
RT_5V5: U5.C1
SFP_RD_N_SFP INTERFACE_SFP1: J18.12 U17.4
SFP_RD_P_SFP INTERFACE_SFP1: J18.13 U17.5
SFP_TD_N_SFP INTERFACE_SFP1: J18.19
SFP_TD_P_SFP INTERFACE_SFP1: J18.18
SPARE_BNC_CONN_0: P1.1
SPARE_BNC_CONN_1: P1.3
SPARE_LEMO_CONN_0: P1.5 P1.7
SPARE_RJ45_0_N: J17.P3
SPARE_RJ45_0_P: J17.P2
SPARE_RJ45_1_N: J17.P5
SPARE_RJ45_1_P: J17.P4
SPARE_RJ45_CM: J17.P1
SQUELCH_SFP INTERFACE_SFP1: R103.1 U17.27
SS_1V8: U12.13
SS_3V3_1: C65.1 U9.13
SS_3V3_2: C76.1 U11.13
SS_5V: U7.13
SS_5V5: U5.A3
THRADJ_SFP INTERFACE_SFP1: C132.2 R102.2 U17.9
VP1V8: U12.1 U12.2(SNS) U12.19 U12.20
VP3V5: C60.1 C61.1 C70.1 C71.1 L6.2 U6.1 U9.14 U9.15 U9.16 U9.17 U11.14 U11.15 U11.16 U11.17 U12.14 U12.15 U12.16 U12.17
VP5V: U7.1 U7.2(SNS) U7.19 U7.20
VP5V5: U5.F1 U5.F2 U5.F3 U5.F4 U5.G1 U5.G2 U5.G3 U5.G4(VOUT8) U7.14 U7.15 U7.16 U7.17
VP12V: FL1.2 U5.B3 U5.B4 U5.C4 U6.4 U6.5 U6.6 U6.21 U6.22 U6.23(VIN6) U6.25
VREF_SFP INTERFACE_SFP1: C133.1 U17.3(VREF)
XORL1: U40.6
XORL2: U40.4(XORL2)
N00638: U1.4
N01590: U1.7
N02344: U2.7
N32209: U40.8
N32213: U40.2
N89867: IC2.25
N89871: IC2.4
N89889: IC2.3
N89893: IC2.48
N90109: IC2.19
N90113: IC2.17
N90529: IC2.11
N91101: IC2.59
N91105: IC2.58
N107878: IC2.39
N127138: U1.3
N140138: L6.1 U6.12 U6.13 U6.14 U6.15 U6.16
N146225: C64.1 U9.1 U9.2(SNS) U9.19 U9.20
N179430: IC2.51
N179442: IC2.50
N183488: U1.8
N185241: C75.1 U11.1 U11.2(SNS) U11.19 U11.20
N202617: U40.16
N202639: U40.11
N202663: U40.14
N202677: U40.13
N224328: IC6.4 U17.16
N224332: IC6.5 U17.22
N224336: IC6.7 J18.2 R92.2 U18.1
N224340: IC6.6 J18.8 R93.2 U18.2
N224392: IC6.13
N224396: IC6.14
N224400: IC6.16
N224404: IC6.15
N224424: IC6.17
N224428: IC6.18
N224432: IC6.20
N224436: IC6.19
N224456: IC7.4
N224460: IC7.5
N224464: IC7.7
N224468: IC7.6
N224484: IC7.8
N224488: IC7.9
N224492: IC7.11
N224496: IC7.10
N252646: U17.19
N266416: IC6.11
N266420: IC6.10
N267255: IC6.8
N267259: IC6.9
N324301: U1.9
N326883: IC2.15
N326887: IC2.14
N326891: IC2.2
N326895: IC2.1
N334368: IC2.8
N334380: IC2.9(XB)
N334392: IC2.7
N334434: IC2.10
N341781: U2.6
N367516: J17.P6 J17.P7 J17.P8 J17.P9

Pads without a net: IC1 6; IC2 5 20 21 53 54 55 56; IC3 7; J8 C2 C3 C6 C7 C8 D4 D5 D29 D30 D31 D33 D35 G6 G7 H1 H2; NOREF 1; NOREF#2 1; NOREF#3 1; NOREF#4 1; NOREF#5 1; NOREF#6 1; NOREF#7 1; NOREF#8 1; U2 4 5 8; U6 2 11 27 28 29; U7 5 6 7 9 10 11 12; U9 5 7 9 12; U11 5 7 9 12; U12 5 6 9 11 12; U16 13 16

## Routing (per net, layer and track width the routed paths; a pad name or vN(x,y) marks a point on that pad's centre or on a via; arc(x,y) is an arc through that point)
12V_CONN: length 10.9
  L3 w0.17: S1.1 35.45,9.86 ; S1.1 32.61,9.86 ; S1.1 34.03,8.44 ; S1.1 34.03,11.27 ; 17.81,12.53 J7.1 ; J7.1 16.12,13.46 ; J7.1 17.81,14.39 ; J7.1 19.49,13.46
12V_FUSE: length 8.9
  TOP w0.17: 31.1,26.35 FL1.1 ; FL1.1 31.71,24.3 ; FL1.1 33.16,26.35 ; FL1.1 31.71,26.96 ; 55.24,15.17 F1.2 ; F1.2 56.41,16.09 ; F1.2 57.59,15.17 ; F1.2 56.41,14.24
12V_SW: length 9.9
  TOP w0.17: S1.2 40.05,9.86 ; S1.2 38.63,8.44 ; S1.2 38.63,11.27 ; S1.2 37.21,9.86 ; 55.24,12.17 F1.1 ; F1.1 56.41,13.09 ; F1.1 56.41,11.24 ; F1.1 57.59,12.17
GND_IN: length 15.2
  TOP w0.17: J7.3 23.44,10.46 ; J7.3 21.57,10.46 ; J7.3 22.51,12.15 ; J7.3 22.51,8.77 ; FL1.4 30.16,26.35 ; FL1.4 29.56,26.96 ; FL1.4 28.1,26.35 ; FL1.4 29.56,24.3 ; J7.2 19.49,7.46 ; J7.2 16.12,7.46 ; J7.2 17.81,6.53 ; J7.2 17.81,8.39
GND_POWER: length 134.6
  TOP w0.17: C70.2 40.44,61.26 40.72,61.54 40.72,62.92 40.21,63.42 C71.2 ; C65.2 4.52,64.97 5.25,64.25 U9.11 ; 28.1,28.1 FL1.3 ; FL1.3 30.16,28.1 ; FL1.3 29.56,30.16 ; C76.2 29.79,66.32 30.52,65.59 U11.11 ; C61.2 15.16,59.92 15.44,60.2 15.44,61.57 14.94,62.08 C60.2
  L2 w0.17: J17.P11 169.42,7.22 ; J17.P11 168.28,8.35 ; J17.P11 167.15,7.22 ; J17.P11 168.28,6.08 ; P1.12 213.16,7.65 ; P1.12 212.22,6.71 ; P1.12 211.28,7.65 ; P1.12 212.22,8.59 ; 165.64,14.33 J17.S1 ; J17.S1 167.07,15.76 ; J17.S1 168.51,14.33 ; J17.S1 167.07,12.89 ; J17.P14 181.57,8.35 ; J17.P14 180.44,7.22 ; J17.P14 181.57,6.08 ; J17.P14 182.71,7.22 ; 207.14,6.71 P1.8 ; P1.8 207.14,8.59 ; P1.8 208.08,7.65 ; P1.8 206.2,7.65 ; J17.P12 171.97,7.22 ; J17.P12 170.83,6.08 ; J17.P12 170.83,8.35 ; J17.P12 169.7,7.22 ; 179.02,6.08 J17.P13 ; J17.P13 180.16,7.22 ; J17.P13 179.02,8.35 ; J17.P13 177.89,7.22 ; P1.6 205.54,7.65 ; P1.6 204.6,6.71 ; P1.6 204.6,8.59 ; P1.6 203.66,7.65 ; P1.2 199.52,8.59 ; P1.2 198.58,7.65 ; P1.2 200.46,7.65 ; P1.2 199.52,6.71 ; P1.10 210.62,7.65 ; P1.10 208.74,7.65 ; P1.10 209.68,8.59 ; P1.10 209.68,6.71 ; J17.S2 182.78,15.76 ; J17.S2 184.22,14.33 ; J17.S2 181.35,14.33 ; J17.S2 182.78,12.89 ; P1.4 202.06,8.59 ; P1.4 203,7.65 ; P1.4 202.06,6.71 ; P1.4 201.12,7.65 ; 179.72,17.63 J17.P10 ; J17.P10 180.64,18.55 ; J17.P10 180.64,16.7 ; J17.P10 181.57,17.63
  L5 w0.17: 165.64,14.33 J17.S1 ; J17.S1 168.51,14.33 ; J17.S1 167.07,12.89 ; J17.S1 167.07,15.76 ; 208.74,7.65 P1.10 ; P1.10 209.68,6.71 ; P1.10 210.62,7.65 ; P1.10 209.68,8.59 ; J17.P11 169.42,7.22 ; J17.P11 168.28,6.08 ; J17.P11 168.28,8.35 ; J17.P11 167.15,7.22 ; 206.2,7.65 P1.8 ; P1.8 208.08,7.65 ; P1.8 207.14,8.59 ; P1.8 207.14,6.71 ; J17.P10 181.57,17.63 ; J17.P10 180.64,18.55 ; J17.P10 179.72,17.63 ; J17.P10 180.64,16.7 ; 199.52,6.71 P1.2 ; P1.2 199.52,8.59 ; P1.2 200.46,7.65 ; P1.2 198.58,7.65 ; 180.44,7.22 J17.P14 ; J17.P14 181.57,6.08 ; J17.P14 182.71,7.22 ; J17.P14 181.57,8.35 ; J17.P12 170.83,8.35 ; J17.P12 171.97,7.22 ; J17.P12 169.7,7.22 ; J17.P12 170.83,6.08 ; P1.12 213.16,7.65 ; P1.12 212.22,8.59 ; P1.12 211.28,7.65 ; P1.12 212.22,6.71 ; 182.78,12.89 J17.S2 ; J17.S2 184.22,14.33 ; J17.S2 181.35,14.33 ; J17.S2 182.78,15.76 ; P1.6 205.54,7.65 ; P1.6 204.6,8.59 ; P1.6 204.6,6.71 ; P1.6 203.66,7.65 ; 179.02,6.08 J17.P13 ; J17.P13 177.89,7.22 ; J17.P13 180.16,7.22 ; J17.P13 179.02,8.35 ; P1.4 202.06,8.59 ; P1.4 203,7.65 ; P1.4 201.12,7.65 ; P1.4 202.06,6.71
FB_3V3_1: length 4.7
  TOP w0.17: U9.3 10.21,63.25 10.9,63.93 10.9,65.35 11.53,65.99 C64.2
FB_3V3_2: length 4.7
  TOP w0.17: C75.2 36.81,67.34 36.17,66.7 36.17,65.28 35.48,64.59 U11.3
SS_3V3_1: length 3.4
  TOP w0.17: U9.13 5.64,63.25 5.64,63.24 C65.1
SS_3V3_2: length 3.4
  TOP w0.17: U11.13 30.91,64.59 30.91,64.59 C76.1
VP3V5: length 42.4
  TOP w0.17: U9.15 4.78,62.25 4.64,62.39 ; C60.1 11.66,61.33 11.65,61.32 C61.1 8.47,59.92 ; 4.64,62.39 4.64,60.38 4.81,60.21 6.92,60.21 ; 4.64,62.39 4.64,62.63 4.76,62.75 U9.14 ; 8.47,59.92 7.21,59.92 6.92,60.21 6.92,60.21 ; 8.47,59.92 7.42,60.96 U9.17 ; 26.03,43.74 L6.2 ; L6.2 28.81,43.74 ; L6.2 27.42,45.77 ; L6.2 27.42,41.71 ; U9.16 6.92,60.21 ; 33.74,61.26 32.49,61.26 32.2,61.55 32.2,61.56 ; 33.74,61.26 C70.1 36.92,62.66 36.93,62.67 C71.1 ; 33.74,61.26 32.7,62.31 U11.17 ; U11.15 30.05,63.59 29.91,63.73 ; 32.2,61.56 30.08,61.56 29.91,61.73 29.91,63.73 ; 32.2,61.56 U11.16 ; 29.91,63.73 29.91,63.97 30.03,64.09 U11.14
VP12V: length 4.1
  TOP w0.17: 31.1,28.1 FL1.2 ; FL1.2 33.16,28.1 ; FL1.2 31.71,30.16
N140138: length 6.8
  TOP w0.17: 33.27,43.74 L6.1 ; L6.1 34.66,45.77 ; L6.1 34.66,41.71 ; L6.1 36.05,43.74
N146225: length 3.5
  TOP w0.17: C64.1 12.47,64.26 11.61,64.26 11.28,63.93 11.28,63.65 10.37,62.75 U9.2
N185241: length 3.5
  TOP w0.17: U11.2 35.64,64.09 36.55,65 36.55,65.28 36.88,65.61 37.74,65.61 C75.1

## Copper pours and planes (outline as drawn; the poured copper is in the pictures)
12V_CONN on L3: 3,24.49 34.99,24.49 35.99,23.49 35.99,2.5 34.49,1 9,1 8,2 8,6.5 7,7.5 3,7.5 2,8.5 2,23.49
12V_FUSE on TOP: 30.73,27.18 61.01,27.18 61.47,26.72 61.47,14.15 61.01,13.69 31.39,13.69 30.73,14.35
12V_SW on TOP: 36.99,13.5 60.98,13.5 61.48,13 61.48,2 60.48,1 37.99,1 36.49,2.5 36.49,13
GND_IN on TOP: 2.49,27.18 30.48,27.18 30.48,1.99 29.49,1 9,1 8,2 8,6.5 7,7.5 3,7.5 2,8.5 2,26.69
GND_POWER on TOP: 30.48,27.41 2.46,27.41 2.03,27.84 2.03,37.95 2.84,38.76 29.57,38.76 30.48,37.85
GND_POWER on L2, L5: 2,2 228,2 228,113 2,113 ; 1 cut-out
VCC3V3 on L3: 91.98,107.47 226.44,107.47 227.94,105.97 227.94,47.49 220.94,40.49 220.94,16.5 101.97,16.5 99.97,18.5 99.97,55.99 24.49,55.99 22.99,57.49 22.99,66.98 24.49,68.48 87.98,68.48 90.98,71.48 90.98,106.47
Net_1 on TOP: 46.99,39.37 47.24,39.12 72.75,39.12 73.56,39.93 73.56,46.13 72.29,47.4 47.57,47.4 46.99,46.81
Net_1165 on L3: 3.5,53.99 19.99,53.99 21.49,52.49 21.49,37.99 22.99,36.49 68.48,36.49 68.48,39.99 69.98,41.49 76.98,41.49 77.98,40.49 77.98,25.99 76.98,24.99 3,24.99 2,25.99 2,52.49
Net_1249 on L3: 19.5,54.99 4.5,54.99 2.5,56.99 2.5,83.48 6.5,87.48 86.98,87.48 88.48,85.98 88.48,71.98 85.98,69.48 22.99,69.48 20.99,67.48 20.99,56.49
VP3V5 on TOP: 1.12,47.4 29.74,47.4 30.23,46.91 30.23,39.45 29.79,39.01 1.09,39.01 0.61,39.5 0.61,46.89
VP3V5 on L3: 23.49,54.49 69.98,54.49 70,54.48 70.13,54.36 70.13,42.19 69.88,41.94 69.93,41.94 67.98,39.99 67.98,36.99 23.49,36.99 22.49,37.99 22.49,53.49
VP12V on TOP: 30.73,27.41 30.73,37.85 31.65,38.76 72.69,38.76 73.63,37.82 73.63,28.78 72.26,27.41
N140138 on TOP: 32.59,47.37 46.35,47.37 46.86,46.86 46.86,39.37 46.58,39.09 43.79,39.09 43.79,39.04 43.74,39.04 43.74,39.09 43.69,39.09 43.68,39.1 43.66,39.09 32.38,39.09 31.9,39.57 31.9,46.69

## Text on the board
User.Comments: Leave 2 mm from edge
DIMENSION: 115.0000 | 111.0000 | 11.9500 | 10.9000 | 8.9000 | 4.0000 | 76.7000 | 81.0000 | 82.0000 | 135.4000 | 139.7000 | 226.0000 | 230.0000 | 69.7000 | 70.3000
